# EAGLE board Bio_v4_LCD1_1_pan (EAGLE 6.5.0)
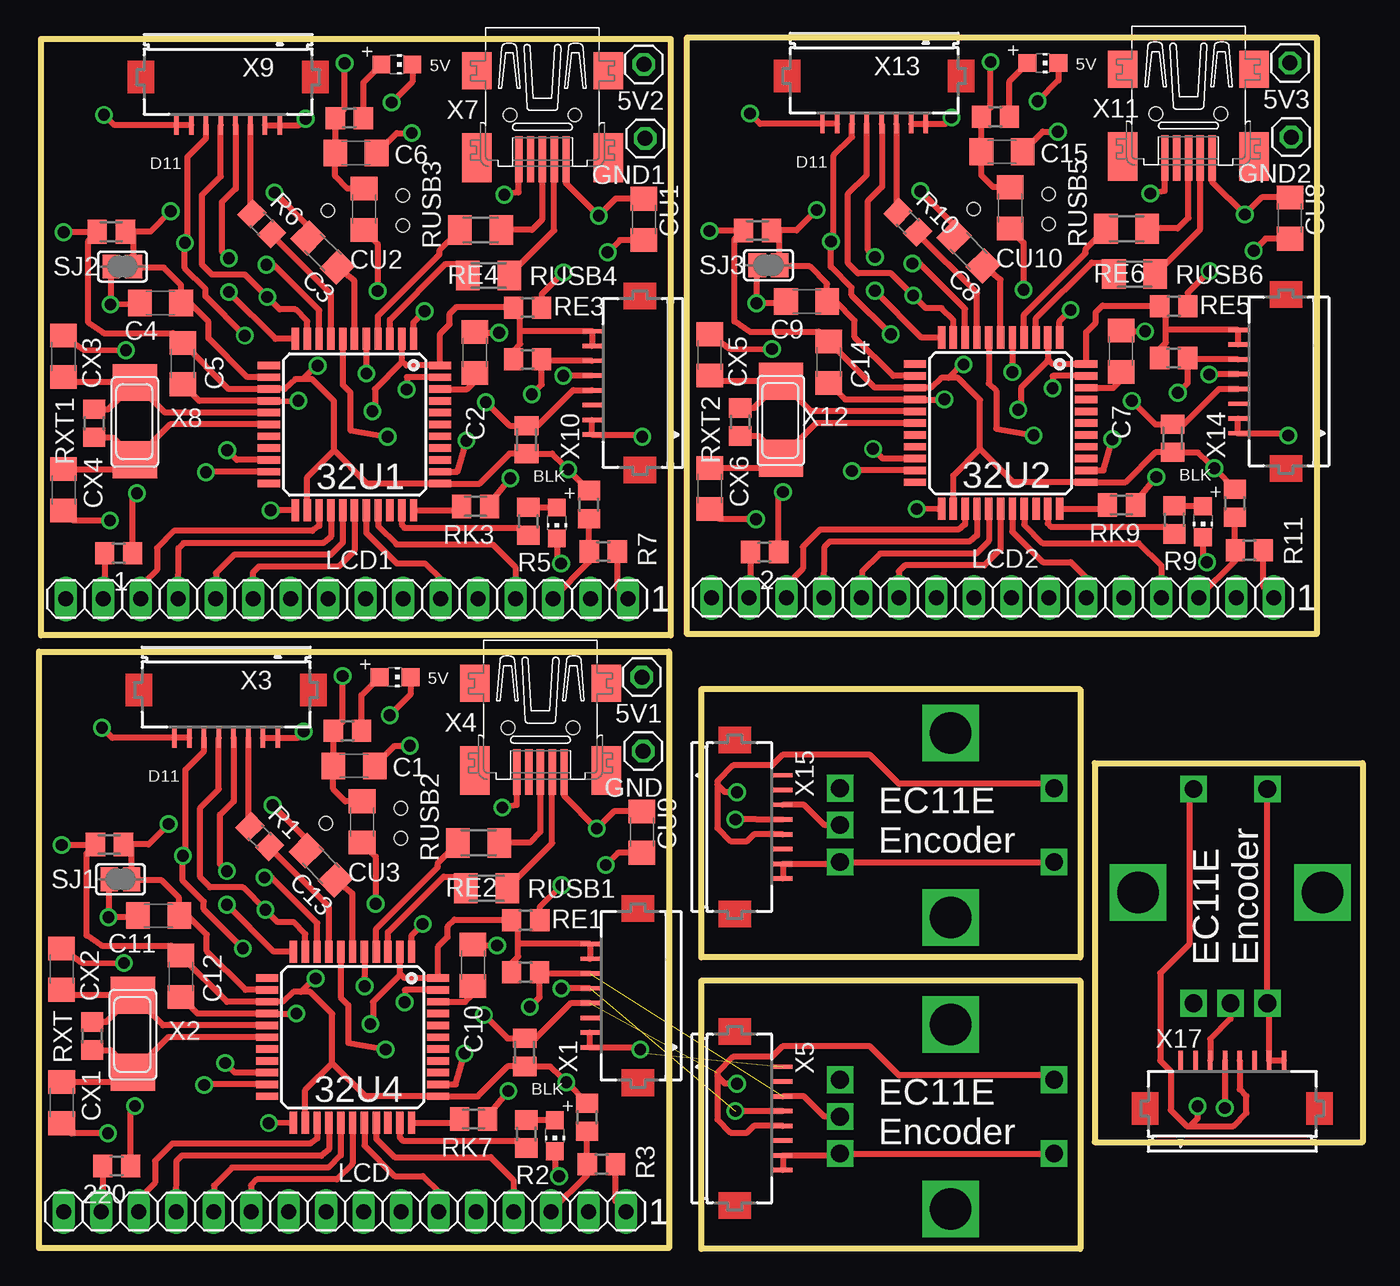
[diagram p0: board, top side]
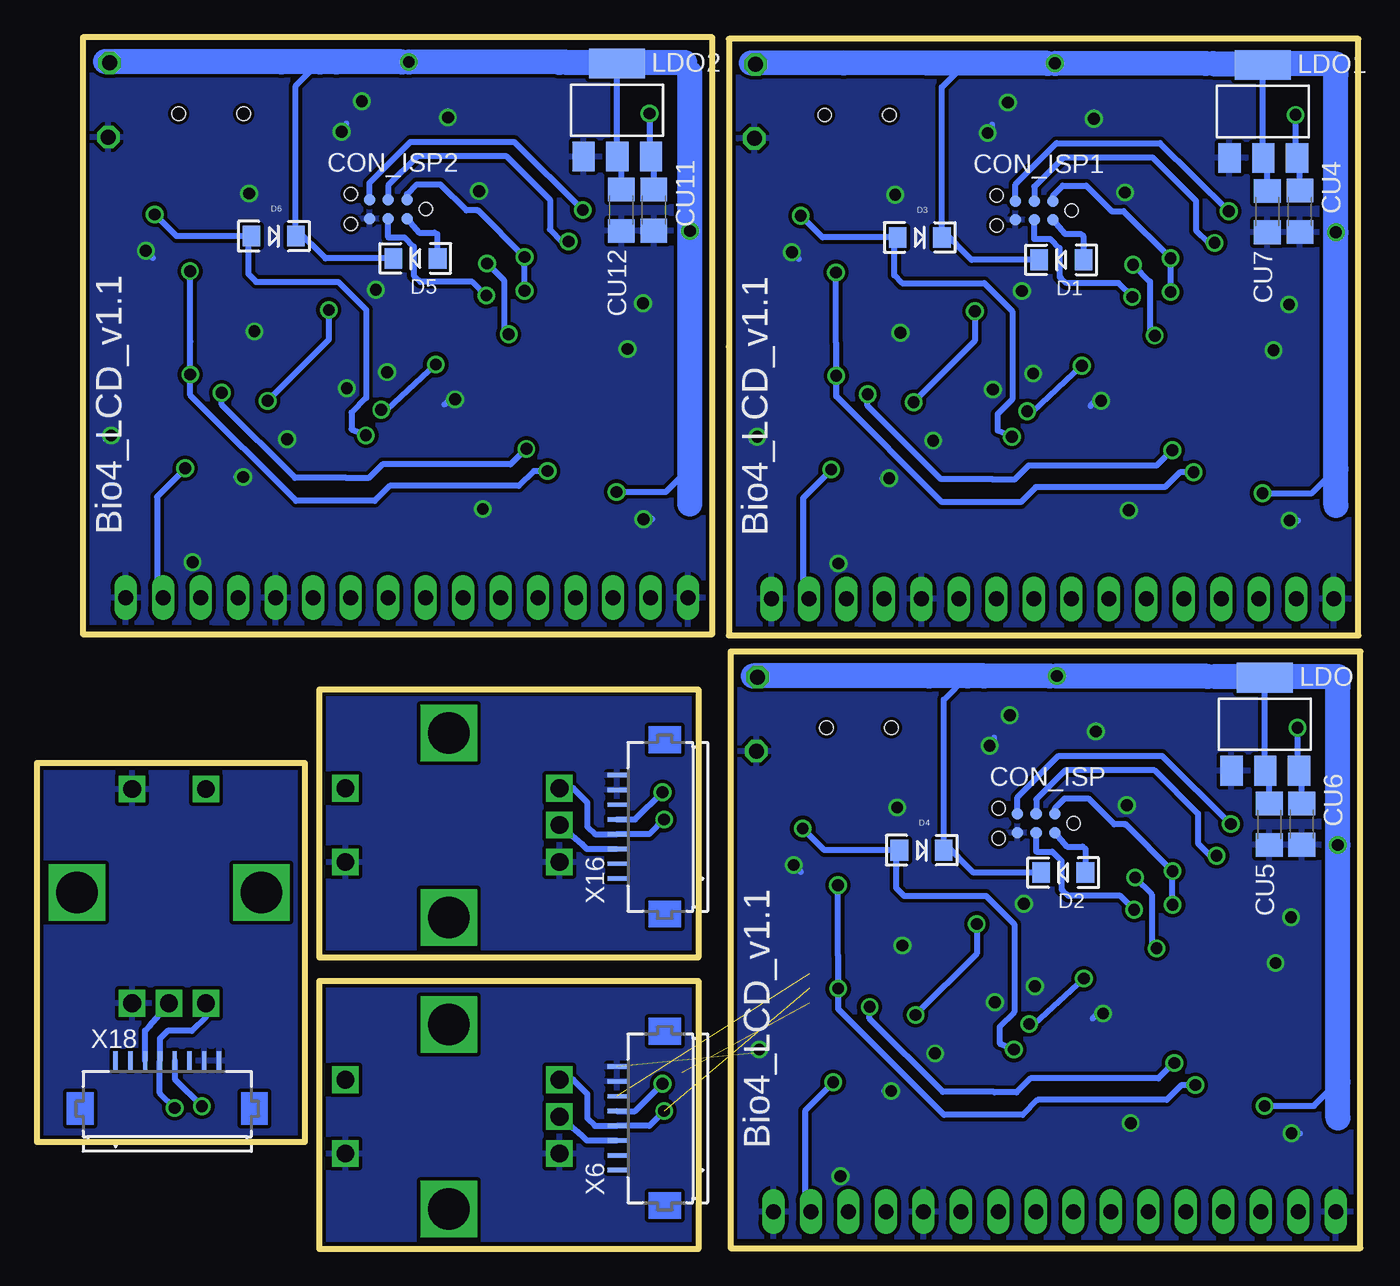
[diagram p1: board, bottom side, seen from below]

Size 89.67 x 82.05 mm. Coordinates in mm from the lower left corner, seen from the top.
Outline: 42.66,0.05 0,0.05 0,40.46 42.66,40.46 42.66,19.61 42.66,19.57 42.66,0.05
Outline: 70.53,0 44.86,0 44.86,18.14 70.53,18.14 70.53,0
Outline: 42.79,41.55 0.13,41.55 0.13,81.96 42.79,81.96 42.79,61.11 42.79,61.07 42.79,41.55
Outline: 86.56,41.64 43.9,41.64 43.9,82.05 86.56,82.05 86.56,61.2 86.56,61.16 86.56,41.64
Outline: 70.53,19.75 44.86,19.75 44.86,37.89 70.53,37.89 70.53,19.75
Outline: 89.67,32.9 89.67,7.23 71.53,7.23 71.53,32.9 89.67,32.9
Copper layers (1*2*15*16): Top 0.035mm / dielectric 0.2mm / layer 2 0.0175mm / dielectric 1.1mm / layer 15 0.0175mm / dielectric 0.2mm / Bottom 0.035mm
Design rules "SeeedStudio_DRU_no_angle_20130527": minimum track width 6mil, minimum drill 12mil, track to track 6mil, track to pad 6mil, pad to pad 6mil, via to via 6mil, smd to smd 0mil, copper to edge 10mil, drill to drill 10mil, minimum pad ring 6mil, minimum via ring 6mil, stop-mask expansion 2mil, vias tented up to drill 25mil, thermal gap 10mil
Net classes: 0 default: width 0.203 mm, clearance 0.25 mm; 1 power: width 0.203 mm, drill 0.305 mm, clearance 0.25 mm; 2 VIN: width 0.457 mm, clearance 0.25 mm; 3 fine: width 0.254 mm, clearance 0.25 mm; 4 aref: width 0.356 mm, clearance 0.25 mm
vRestrict: area 8.7,33.5 to 16.8,37.3; area 8.8,75 to 16.9,78.8; area 52.6,75.1 to 60.7,78.9

## Footprints (pad centres in the part's own frame; a part is rotated, then mirrored left to right if it is on the bottom)
R0805 = smd 1.3 x 1.5: 1 -0.95,0; 2 0.95,0
1X01 = drill 1.016 octagon: 1 0,0
TQFP44 = smd 1.5 x 0.5: 1 -5.8,4; 2 -5.8,3.2; 3 -5.8,2.4; 4 -5.8,1.6; 5 -5.8,0.8; 6 -5.8,0; 7 -5.8,-0.8; 8 -5.8,-1.6; 9 -5.8,-2.4; 10 -5.8,-3.2; 11 -5.8,-4; 23 5.8,-4; 24 5.8,-3.2; 25 5.8,-2.4; 26 5.8,-1.6; 27 5.8,-0.8; 28 5.8,0; 29 5.8,0.8; 30 5.8,1.6; 31 5.8,2.4; 32 5.8,3.2; 33 5.8,4 | smd 0.5 x 1.5: 12 -4,-5.8; 13 -3.2,-5.8; 14 -2.4,-5.8; 15 -1.6,-5.8; 16 -0.8,-5.8; 17 0,-5.8; 18 0.8,-5.8; 19 1.6,-5.8; 20 2.4,-5.8; 21 3.2,-5.8; 22 4,-5.8; 34 4,5.8; 35 3.2,5.8; 36 2.4,5.8; 37 1.6,5.8; 38 0.8,5.8; 39 0,5.8; 40 -0.8,5.8; 41 -1.6,5.8; 42 -2.4,5.8; 43 -3.2,5.8; 44 -4,5.8
CHIP-LED0805 = smd 1.2 x 1.2: A 0,-1.05; C 0,1.05
C1206 = smd 1.6 x 1.8: 1 -1.4,0; 2 1.4,0
TC2030-MCP-NL = smd 0.787 x 0.787: 5V 1.27,0.635; GND 3.81,0.635; MISO 1.27,-0.635; MOSI 2.54,0.635; RESET 3.81,-0.635; SCK 2.54,-0.635 | hole 0.889: 0,0; 5.08,-1.016; 5.08,1.016
LED-1206 = smd 1.2 x 1.4: A -1.5,0; C 1.5,0
1X16 = drill 1.016 long: 1 -19.05,0; 2 -16.51,0; 3 -13.97,0; 4 -11.43,0; 5 -8.89,0; 6 -6.35,0; 7 -3.81,0; 8 -1.27,0; 9 1.27,0; 10 3.81,0; 11 6.35,0; 12 8.89,0; 13 11.43,0; 14 13.97,0; 15 16.51,0; 16 19.05,0
SOT223 = smd 1.499 x 2.007: 1 -2.261,-3.15; 2 0.025,-3.15; 3 2.311,-3.15 | smd 3.81 x 2.007: 4 0,3.15
M0805 = smd 1.3 x 1.6: 1 -0.95,0; 2 0.95,0
M1206 = smd 1.6 x 2: 1 -1.4,0; 2 1.4,0
SJ = smd 1.168 x 1.6: 1 -0.762,0; 2 0.762,0
EC11E = drill 1.2 square: A -2.5,0; B 0,0; C 2.5,0; D -2.5,14.5; E 2.5,14.5 | drill 2.8 square: P$1 6.25,7.5; P$2 -6.25,7.5
FH12-08S-1SH = smd 0.3 x 1.3: 1 -3.5,3.25; 2 -2.5,3.25; 3 -1.5,3.25; 4 -0.5,3.25; 5 0.5,3.25; 6 1.5,3.25; 7 2.5,3.25; 8 3.5,3.25
NX6035 = smd 2.5 x 3: P$1 2.665,0; P$2 -2.565,0
32005-201 = smd 3.1 x 0.5: 1 3,1.6; 2 3,0.8; 3 3,0; 4 3,-0.8; 5 3,-1.6 | smd 2.5 x 2: M1 -3,-4.45; M2 -3,4.45 | smd 3.3 x 2: M3 2.9,4.45; M4 2.9,-4.45 | hole 0.9: 0,2.2; 0,-2.2

## Placement (x,y rotation side)
1  220  [R0805]  5.39,47.11 180 top
2  220  [R0805]  49.16,47.2 180 top
5V1  [1X01]  40.84,38.73 180 top
5V2  [1X01]  40.97,80.24 180 top
5V3  [1X01]  84.74,80.33 180 top
32U1  32U4  [TQFP44]  21.37,55.84 270 top
32U2  32U4  [TQFP44]  65.14,55.93 270 top
32U4  32U4  [TQFP44]  21.24,14.33 270 top
220  220  [R0805]  5.25,5.61 180 top
BKLD  RED  [CHIP-LED0805]  34.95,7.66 180 top
BKLD1  RED  [CHIP-LED0805]  35.08,49.16 180 top
BKLD2  RED  [CHIP-LED0805]  78.85,49.25 180 top
C1  100nF  [C1206]  21.34,32.72 0 top
C2  100nF  [C1206]  29.52,60.71 90 top
C3  100nF  [C1206]  19.21,67.48 315 top
C4  100nF  [C1206]  8.23,64.07 180 top
C5  100nF  [C1206]  9.73,59.96 90 top
C6  100nF  [C1206]  21.47,74.22 0 top
C7  100nF  [C1206]  73.3,60.8 90 top
C8  100nF  [C1206]  62.98,67.57 315 top
C9  100nF  [C1206]  52,64.16 180 top
C10  100nF  [C1206]  29.39,19.21 90 top
C11  100nF  [C1206]  8.1,22.57 180 top
C12  100nF  [C1206]  9.6,18.46 90 top
C13  100nF  [C1206]  19.08,25.98 315 top
C14  100nF  [C1206]  53.5,60.05 90 top
C15  100nF  [C1206]  65.24,74.31 0 top
CON_ISP  SPI  [TC2030-MCP-NL]  19.43,28.83 180 bottom
CON_ISP1  SPI  [TC2030-MCP-NL]  19.56,70.33 180 bottom
CON_ISP2  SPI  [TC2030-MCP-NL]  63.33,70.42 180 bottom
CU1  10uF  [C1206]  40.97,69.73 90 top
CU2  10uF  [C1206]  22.02,70.42 270 top
CU3  10uF  [C1206]  21.88,28.92 270 top
CU4  10uF  [C1206]  4.1,70.27 270 bottom
CU5  10uF  [C1206]  6.17,28.75 270 bottom
CU6  10uF  [C1206]  3.97,28.77 270 bottom
CU7  10uF  [C1206]  6.3,70.26 270 bottom
CU8  10uF  [C1206]  84.75,69.82 90 top
CU9  10uF  [C1206]  40.84,28.23 90 top
CU10  10uF  [C1206]  65.79,70.51 270 top
CU11  10uF  [C1206]  47.87,70.36 270 bottom
CU12  10uF  [C1206]  50.07,70.35 270 bottom
CX1  22pF  [C1206]  1.53,9.91 90 top
CX2  22pF  [C1206]  1.52,18.95 270 top
CX3  22pF  [C1206]  1.65,60.45 270 top
CX4  22pF  [C1206]  1.66,51.41 90 top
CX5  22pF  [C1206]  45.42,60.55 270 top
CX6  22pF  [C1206]  45.43,51.5 90 top
D1  1N581D1206  [LED-1206]  20.26,66.99 180 bottom
D2  1N581D1206  [LED-1206]  20.12,25.49 180 bottom
D3  1N581D1206  [LED-1206]  29.86,68.5 0 bottom
D4  1N581D1206  [LED-1206]  29.73,27 0 bottom
D5  1N581D1206  [LED-1206]  64.03,67.08 180 bottom
D6  1N581D1206  [LED-1206]  73.63,68.59 0 bottom
GND  [1X01]  40.93,33.71 180 top
GND1  [1X01]  41.06,75.21 180 top
GND2  [1X01]  84.83,75.3 180 top
LCD  [1X16]  20.72,2.52 180 top
LCD1  [1X16]  20.85,44.02 180 top
LCD2  [1X16]  64.62,44.11 180 top
LDO  NCP1117LPST50T3G  [SOT223]  6.47,35.53 0 bottom
LDO1  NCP1117LPST50T3G  [SOT223]  6.6,77.04 0 bottom
LDO2  NCP1117LPST50T3G  [SOT223]  50.37,77.13 0 bottom
LDPW1  RED  [CHIP-LED0805]  24.24,80.22 270 top
LDPW2  RED  [CHIP-LED0805]  68.01,80.31 270 top
LDPW5  RED  [CHIP-LED0805]  24.11,38.72 270 top
R1  1k  [R0805]  14.95,27.93 315 top
R2  1k  [R0805]  33.01,7.78 90 top
R3  1k  [R0805]  38.09,5.73 0 top
R4  1k  [R0805]  21.02,76.59 0 top
R5  1k  [R0805]  33.14,49.28 90 top
R6  1k  [R0805]  15.08,69.43 315 top
R7  1k  [R0805]  38.22,47.24 0 top
R8  1k  [R0805]  64.79,76.68 0 top
R9  1k  [R0805]  76.91,49.37 90 top
R10  1k  [R0805]  58.85,69.52 315 top
R11  1k  [R0805]  82,47.33 0 top
R13  1k  [R0805]  20.89,35.08 0 top
RE1  5k  [R0805]  32.97,22.25 0 top
RE2  5k  [R0805]  32.96,18.74 0 top
RE3  5k  [R0805]  33.1,63.75 0 top
RE4  5k  [R0805]  33.09,60.25 0 top
RE5  5k  [R0805]  76.87,63.84 0 top
RE6  5k  [R0805]  76.86,60.34 0 top
RK1  10k  [R0805]  37.12,8.91 270 top
RK2  10k  [M0805]  32.9,13.3 270 top
RK3  10k  [M0805]  29.56,50.29 180 top
RK4  10k  [M0805]  4.89,68.89 180 top
RK5  10k  [R0805]  37.25,50.41 270 top
RK6  10k  [M0805]  4.76,27.39 180 top
RK7  10k  [M0805]  29.43,8.79 180 top
RK8  10k  [M0805]  33.03,54.81 270 top
RK9  10k  [M0805]  73.34,50.38 180 top
RK10  10k  [M0805]  48.66,68.98 180 top
RK11  10k  [R0805]  81.02,50.5 270 top
RK12  10k  [M0805]  76.8,54.9 270 top
RUSB1  22  [M1206]  30.31,24.42 0 top
RUSB2  22  [M1206]  29.77,27.5 0 top
RUSB3  22  [M1206]  29.91,69 0 top
RUSB4  22  [M1206]  30.44,65.93 0 top
RUSB5  22  [M1206]  73.68,69.09 0 top
RUSB6  22  [M1206]  74.22,66.02 0 top
RXT  1M  [R0805]  3.6,14.42 270 top
RXT1  1M  [R0805]  3.73,55.92 270 top
RXT2  1M  [R0805]  47.5,56.01 270 top
SJ1  [SJ]  5.51,25.03 0 top
SJ2  [SJ]  5.64,66.53 0 top
SJ3  [SJ]  49.41,66.62 0 top
U$1  EC11E  [EC11E]  54.27,8.95 270 top
U$2  EC11E  [EC11E]  54.27,28.7 270 top
U$3  EC11E  [EC11E]  80.72,16.64 0 top
X1  FH12-08S-1SH  [FH12-08S-1SH]  40.57,17.15 90 top
X2  16MHz  [NX6035]  6.36,14.51 90 top
X3  FH12-08S-1SH  [FH12-08S-1SH]  12.67,37.85 180 top
X4  MINI-USB  [32005-201]  33.97,35.3 270 top
X5  FH12-08S-1SH  [FH12-08S-1SH]  47.14,8.83 270 top
X6  FH12-08S-1SH  [FH12-08S-1SH]  47.12,8.84 90 bottom
X7  MINI-USB  [32005-201]  34.1,76.8 270 top
X8  16MHz  [NX6035]  6.49,56.02 90 top
X9  FH12-08S-1SH  [FH12-08S-1SH]  12.8,79.36 180 top
X10  FH12-08S-1SH  [FH12-08S-1SH]  40.71,58.65 90 top
X11  MINI-USB  [32005-201]  77.87,76.89 270 top
X12  16MHz  [NX6035]  50.26,56.11 90 top
X13  FH12-08S-1SH  [FH12-08S-1SH]  56.58,79.45 180 top
X14  FH12-08S-1SH  [FH12-08S-1SH]  84.48,58.74 90 top
X15  FH12-08S-1SH  [FH12-08S-1SH]  47.14,28.58 270 top
X16  FH12-08S-1SH  [FH12-08S-1SH]  47.12,28.58 90 bottom
X17  FH12-08S-1SH  [FH12-08S-1SH]  80.84,9.51 0 top
X18  FH12-08S-1SH  [FH12-08S-1SH]  80.84,9.5 0 bottom

## Library data of the parts
1 2 220 C1-C15 CU1-CU12 CX1-CX6 R1-R3 R5-R7 R9-R11 RE1-RE6 RK1 RK5 RK11 RXT RXT1 RXT2 = rcl
5V1-5V3 GND GND1 GND2 = Headerlibrary
32U1 32U2 32U4 BKLD BKLD1 BKLD2 LDPW1 LDPW2 LDPW5 = adafruit
CON_ISP CON_ISP1 CON_ISP2 D1-D6 LCD LCD1 LCD2 LDO LDO1 LDO2 U$1-U$3 X2 X8 X12 = lpatiny
R4 R8 R13 RK2-RK4 RK6-RK10 RK12 RUSB1-RUSB6 = resistor
SJ1-SJ3 = jumper
X1 X3 X5 X6 X9 X10 X13-X18 = con-hirose; OC_FARNELL: unknown; OC_NEWARK: unknown
X4 X7 X11 = con-cypressindustries; OC_FARNELL: unknown; OC_NEWARK: unknown

## Nets
+5V/1 [fine]: 5V1.1 32U4.2 32U4.14 32U4.24 32U4.34 32U4.44 220.1 C1.1 C12.2 CU3.1 CU5.1 D2.C D4.C LCD.2 LDO.2 LDO.4 R13.1 RE1.1 RE2.1 RK1.1 RK2.2 RK6.2 X1.7 X1.8
+5V/2 [fine]: 1.1 5V2.1 32U1.2 32U1.14 32U1.24 32U1.34 32U1.44 C5.2 C6.1 CU2.1 CU7.1 D1.C D3.C LCD1.2 LDO1.2 LDO1.4 R4.1 RE3.1 RE4.1 RK4.2 RK5.1 RK8.2 X10.7 X10.8
+5V/3 [fine]: 2.1 5V3.1 32U2.2 32U2.14 32U2.24 32U2.34 32U2.44 C14.2 C15.1 CU10.1 CU12.1 D5.C D6.C LCD2.2 LDO2.2 LDO2.4 R8.1 RE5.1 RE6.1 RK10.2 RK11.1 RK12.2 X14.7 X14.8
+12V [power]: CU6.1 LDO.3 X3.7 X3.8
+12V1 [power]: CU4.1 LDO1.3 X9.7 X9.8
+12V2 [power]: CU11.1 LDO2.3 X13.7 X13.8
A0: 32U4.36
A1: 32U4.37
A2: 32U4.38
A3: 32U4.39
A4: 32U4.40
A5: 32U4.41
A6: 32U4.25 LCD.14
A7: 32U1.38
A8: 32U1.39
A9: 32U1.40
A10: 32U1.41
A11: 32U1.37
A12: 32U1.36
A13: 32U1.25 LCD1.14
A14: 32U2.38
A15: 32U2.39
A16: 32U2.40
A17: 32U2.41
A18: 32U2.37
A19: 32U2.36
A20: 32U2.25 LCD2.14
AREF: 32U4.42 C10.1
AREF1: 32U1.42 C2.1
AREF2: 32U2.42 C7.1
CS_32U1: R6.1 X9.3
CS_32U2: R10.1 X13.3
CS_32U4: R1.1 X3.3
D5*: 32U4.31
D5*1: 32U1.31
D5*2: 32U2.31
D6*: 32U4.27 LCD.12
D6*1: 32U1.27 LCD1.12
D6*2: 32U2.27 LCD2.12
D7*: 32U4.1 RK2.1 U$1.D X1.4 X5.5 X6.5
D7*1: 32U1.1 RK8.1 X10.4
D7*2: 32U2.1 RK12.1 X14.4
D7*3: U$2.D X15.5 X16.5
D7*4: U$3.D X17.5 X18.5
D8*: 32U4.28 LCD.11
D8*1: 32U1.28 LCD1.11
D8*2: 32U2.28 LCD2.11
D9*: 32U4.29 LCD.6
D9*1: 32U1.29 LCD1.6
D9*2: 32U2.29 LCD2.6
D10*: 32U4.30 LCD.4
D10*1: 32U1.30 LCD1.4
D10*2: 32U2.30 LCD2.4
D11*: 32U4.12
D11*1: 32U1.12
D11*2: 32U2.12
D12*: 32U4.26 LCD.13
D12*1: 32U1.26 LCD1.13
D12*2: 32U2.26 LCD2.13
D13*: 32U4.32 R2.1
D13*1: 32U1.32 R5.1
D13*2: 32U2.32 R9.1
GND [power]: 32U4.5 32U4.15 32U4.23 32U4.35 32U4.43 BKLD.C C1.2 C10.2 C11.2 C12.1 C13.1 CON_ISP.GND CU3.2 CU5.2 CU6.2 CU9.1 CX1.1 CX2.1 GND.1 LCD.1 LCD.5 LCD.16 LDO.1 LDPW5.C R3.2 RK7.1 SJ1.1 U$1.C U$1.E X1.1 X1.2 X3.1 X3.2 X4.5 X5.7 X5.8 X6.7 X6.8
GND1 [power]: 32U1.5 32U1.15 32U1.23 32U1.35 32U1.43 BKLD1.C C2.2 C3.1 C4.2 C5.1 C6.2 CON_ISP1.GND CU1.1 CU2.2 CU4.2 CU7.2 CX3.1 CX4.1 GND1.1 LCD1.1 LCD1.5 LCD1.16 LDO1.1 LDPW1.C R7.2 RK3.1 SJ2.1 X7.5 X9.1 X9.2 X10.1 X10.2
GND2 [power]: 32U2.5 32U2.15 32U2.23 32U2.35 32U2.43 BKLD2.C C7.2 C8.1 C9.2 C14.1 C15.2 CON_ISP2.GND CU8.1 CU10.2 CU11.2 CU12.2 CX5.1 CX6.1 GND2.1 LCD2.1 LCD2.5 LCD2.16 LDO2.1 LDPW2.C R11.2 RK9.1 SJ3.1 X11.5 X13.1 X13.2 X14.1 X14.2
GND3 [power]: U$2.C U$2.E X15.7 X15.8 X16.7 X16.8
GND4 [power]: U$3.C U$3.E X17.7 X17.8 X18.7 X18.8
HWB: 32U4.33 RK7.2
HWB1: 32U1.33 RK3.2
HWB2: 32U2.33 RK9.2
ISP+5V: CON_ISP.5V D2.A
ISP+5V1: CON_ISP1.5V D1.A
ISP+5V2: CON_ISP2.5V D5.A
MISO: 32U4.11 CON_ISP.MISO X3.4
MISO1: 32U1.11 CON_ISP1.MISO X9.4
MISO2: 32U2.11 CON_ISP2.MISO X13.4
MOSI: 32U4.10 CON_ISP.MOSI X3.5
MOSI1: 32U1.10 CON_ISP1.MOSI X9.5
MOSI2: 32U2.10 CON_ISP2.MOSI X13.5
N$1: 32U4.6 C13.2
N$2: LCD.3 R3.1 RK1.2
N$3: BKLD.A R2.2
N$4: LDPW1.A R4.2
N$5: BKLD1.A R5.2
N$6: 32U1.17 CX4.2 RXT1.2 X8.P$2
N$7: 32U1.6 C3.2
N$8: LCD1.3 R7.1 RK5.2
N$9: 1.2 LCD1.15
N$10: LDPW2.A R8.2
N$11: 220.2 LCD.15
N$12: LDPW5.A R13.2
N$13: BKLD2.A R9.2
N$14: 32U2.17 CX6.2 RXT2.2 X12.P$2
N$15: 32U2.6 C8.2
N$16: LCD2.3 R11.1 RK11.2
N$17: 2.2 LCD2.15
N$42: 32U4.17 CX1.2 RXT.2 X2.P$2
RESET: 32U4.13 C11.1 CON_ISP.RESET RK6.1 SJ1.2
RESET1: 32U1.13 C4.1 CON_ISP1.RESET RK4.1 SJ2.2
RESET2: 32U2.13 C9.1 CON_ISP2.RESET RK10.1 SJ3.2
RX: 32U4.20 RE2.2 U$1.B X1.6 X5.3 X6.3
RX1: 32U1.20 RE4.2 X10.6
RX2: 32U2.20 RE6.2 X14.6
RX3: U$2.B X15.3 X16.3
RX4: U$3.B X17.3 X18.3
RXLED: 32U4.8 R1.2
RXLED1: 32U1.8 R6.2
RXLED2: 32U2.8 R10.2
SCK: 32U4.9 CON_ISP.SCK X3.6
SCK1: 32U1.9 CON_ISP1.SCK X9.6
SCK2: 32U2.9 CON_ISP2.SCK X13.6
SCL: 32U4.18
SCL1: 32U1.18
SCL2: 32U2.18
SDA: 32U4.19
SDA1: 32U1.19
SDA2: 32U2.19
TX: 32U4.21 RE1.2 U$1.A X1.5 X5.4 X6.4
TX1: 32U1.21 RE3.2 X10.5
TX2: 32U2.21 RE5.2 X14.5
TX3: U$2.A X15.4 X16.4
TX4: U$3.A X17.4 X18.4
TXLED: 32U4.22
TXLED1: 32U1.22
TXLED2: 32U2.22
USB_N: 32U4.3 RUSB1.1
USB_N1: 32U1.3 RUSB4.1
USB_N2: 32U2.3 RUSB6.1
USB_P: 32U4.4 RUSB2.1
USB_P1: 32U1.4 RUSB3.1
USB_P2: 32U2.4 RUSB5.1
USBC_N: RUSB1.2 X4.2
USBC_N1: RUSB4.2 X7.2
USBC_N2: RUSB6.2 X11.2
USBC_P: RUSB2.2 X4.3
USBC_P1: RUSB3.2 X7.3
USBC_P2: RUSB5.2 X11.3
VUSB: 32U4.7 CU9.2 D4.A X4.1
VUSB1: 32U1.7 CU1.2 D3.A X7.1
VUSB2: 32U2.7 CU8.2 D6.A X11.1
XTAL1: 32U4.16 CX2.2 RXT.1 X2.P$1
XTAL2: 32U1.16 CX3.2 RXT1.1 X8.P$1
XTAL3: 32U2.16 CX5.2 RXT2.1 X12.P$1

## Tracks (layer width: path | path; a pad name or v marks a point on that pad's centre or on a via)
+5V/1  (via drill 0.8, 0.8 pad 0.61, 0.8 pad 0.81)
  Top 0.406: 32U4.24 18.04,10.77 19.85,12.59 | 19.85,12.59 19.85,15.91 18.36,17.4 17.73,17.4 | 17.73,17.4 17.23,17.4 16.51,16.74 15.45,16.74 32U4.14 12.73,16.74 C12.2 8.93,20.53 4.23,20.53 3.21,21.23 3.21,26.79 3.78,27.35 | 19.85,12.59 22.11,10.34 32U4.34 29.71,10.34 31.73,12.35 RK2.2 34.62,12.35 35.35,11.65 v35.72,11.28 RK1.1 36.89,10.09 | 24.44,18.65 24.76,18.34 32U4.44 27.04,20.49 27.68,21.14 27.68,21.84 28.14,22.3 31.98,22.3 RE1.1 32.45,21.82 32.45,20.63 | 32U4.2 24.44,18.65 | 24.44,18.65 24.44,18.55 22.62,16.73 22.62,15.42 v22.44,15.23 | v18.74,18.31 18.74,18.41 17.73,17.4 | RK6.2 3.78,27.35 | 3.78,27.35 v1.52,27.35 | v20.56,38.8 20.56,35.71 R13.1 C1.1 19.93,31.14 20.75,30.32 CU3.1 | 220.1 6.2,9.39 v6.49,9.68 | RE2.1 32.01,19.34 32.45,19.79 32.45,20.63 | 32.45,20.63 32.47,20.65 X1.8 X1.7
  Bottom 0.406: 1.52,8.36 1.52,8.85 | 1.52,38.05 1.52,38.76 | v22.44,15.23 22.04,15.23 v18.74,18.31 | 1.52,38.4 1.88,38.76 | v6.49,9.68 3.15,9.68 1.52,11.31 | D4.C 28.23,27.51 | 28.23,27.51 28.23,37.19 26.61,38.81 | D2.C 26.21,25.49 28.23,27.51 | 6.47,38.76 LDO.4 | 6.47,38.78 LDO.4 | LDO.4 6.47,32.38 LDO.2 6.17,32.11 CU5.1 | 5V1.1 41.42,38.93 41.13,38.82 | LCD.2 37.63,2.92 37.63,9.34 36.07,10.9 v35.72,11.28 | 9.86,38.78 10.37,38.78 9.86,38.78 | v20.56,38.8 21.06,38.8 v20.57,38.8 v20.56,38.8
  Bottom 1.676: 1.52,8.85 1.52,11.31 v1.52,27.35 1.52,38.05 1.52,38.4 | 1.52,38.76 1.88,38.76 6.47,38.76 | 10.37,38.78 v20.56,38.8 | 21.06,38.8 25.49,38.81 26.61,38.81 29.21,38.81 34.88,38.82 41.13,38.82 | 9.86,38.78 6.47,38.78
+5V/2  (via drill 0.8, 0.8 pad 0.61, 0.8 pad 0.81)
  Top 0.406: 32U1.24 18.17,52.28 19.98,54.09 | 19.98,54.09 19.98,57.42 18.5,58.91 17.86,58.91 | 17.86,58.91 17.36,58.91 16.64,58.24 32U1.14 12.86,58.24 C5.2 9.06,62.03 4.37,62.03 3.34,62.73 3.34,68.29 3.91,68.86 | 19.98,54.09 22.24,51.84 32U1.34 29.84,51.84 31.86,53.86 RK8.2 34.75,53.86 35.48,53.15 v35.85,52.78 RK5.1 37.02,51.59 | 24.57,60.15 24.89,59.84 32U1.44 27.17,62 27.82,62.64 27.82,63.34 28.27,63.8 32.11,63.8 RE3.1 32.59,63.32 32.59,62.13 | 32U1.2 24.57,60.15 | 24.57,60.15 24.57,60.05 22.75,58.23 22.75,56.92 v22.57,56.74 | v18.87,59.81 18.87,59.91 17.86,58.91 | RK4.2 3.91,68.86 | 3.91,68.86 v1.66,68.86 | v20.7,80.3 20.7,77.21 R4.1 C6.1 20.06,74.21 20.06,72.64 20.88,71.82 CU2.1 | 1.1 6.34,50.89 v6.63,51.18 | RE4.1 32.14,60.85 32.59,61.29 32.59,62.13 | 32.59,62.13 32.6,62.15 X10.8 X10.7
  Bottom 0.406: 1.65,49.86 1.65,50.35 | 1.66,80.26 1.66,79.56 1.66,79.9 | v22.57,56.74 22.17,56.74 v18.87,59.81 | v6.63,51.18 3.29,51.18 1.65,52.81 | D3.C 28.36,69.01 | 28.36,69.01 28.36,78.7 26.74,80.31 | D1.C 26.34,66.99 28.36,69.01 | 6.6,80.26 LDO1.4 | 6.6,80.28 LDO1.4 | LDO1.4 6.6,73.89 LDO1.2 6.3,73.61 CU7.1 | 5V2.1 41.56,80.43 41.26,80.32 | LCD1.2 37.76,44.42 37.76,50.84 36.2,52.41 v35.85,52.78 | 9.99,80.28 10.5,80.28 9.99,80.28 | v20.7,80.3 21.19,80.3 v20.7,80.3
  Bottom 1.676: 1.65,50.35 1.65,52.81 v1.66,68.86 1.66,79.56 | 1.66,80.26 2.02,80.26 | 10.5,80.28 v20.7,80.3 | 21.19,80.3 25.62,80.31 26.74,80.31 29.34,80.31 35.01,80.32 41.26,80.32 | 1.66,79.9 2.02,80.26 | 2.02,80.26 6.6,80.26 | 9.99,80.28 6.6,80.28
+5V/3  (via drill 0.8, 0.8 pad 0.61, 0.8 pad 0.81)
  Top 0.406: 32U2.24 61.94,52.37 63.76,54.18 | 63.76,54.18 63.76,57.51 62.27,59 61.63,59 | 61.63,59 61.13,59 60.41,58.33 59.36,58.33 32U2.14 56.63,58.33 C14.2 52.83,62.12 48.14,62.12 47.11,62.82 47.11,68.38 47.68,68.95 | 63.76,54.18 66.01,51.93 32U2.34 73.62,51.93 75.63,53.95 RK12.2 78.52,53.95 79.25,53.24 v79.62,52.87 RK11.1 80.79,51.68 | 68.34,60.24 68.66,59.93 32U2.44 70.94,62.09 71.59,62.73 71.59,63.43 72.04,63.89 75.88,63.89 RE5.1 76.36,63.41 76.36,62.22 | 32U2.2 68.34,60.24 | 68.34,60.24 68.34,60.14 66.52,58.32 66.52,57.01 v66.34,56.83 | v62.64,59.9 62.64,60 61.63,59 | RK10.2 47.68,68.95 | 47.68,68.95 v45.43,68.95 | v64.47,80.39 64.47,77.3 R8.1 C15.1 63.83,74.3 63.83,72.73 64.65,71.91 CU10.1 | 2.1 50.11,50.98 v50.4,51.27 | RE6.1 75.91,60.94 76.36,61.38 76.36,62.22 | 76.36,62.22 76.38,62.24 X14.8 X14.7
  Bottom 0.406: 45.43,49.95 45.43,50.44 | 53.76,80.37 54.27,80.37 | v66.34,56.83 65.94,56.83 v62.64,59.9 | v50.4,51.27 47.06,51.27 45.43,52.9 | D6.C 72.13,69.1 | 72.13,69.1 72.13,78.79 70.51,80.4 | D5.C 70.11,67.08 72.13,69.1 | 50.37,80.35 LDO2.4 | 50.37,80.37 LDO2.4 | LDO2.4 50.37,73.98 LDO2.2 50.07,73.7 CU12.1 | 5V3.1 85.33,80.52 85.03,80.41 | LCD2.2 81.53,44.51 81.53,50.93 79.97,52.5 v79.62,52.87 | 45.43,79.65 45.43,80.35 45.79,80.35 45.43,79.99 45.43,79.65 | v64.47,80.39 64.96,80.39 v64.47,80.39
  Bottom 1.676: 45.43,50.44 45.43,52.9 v45.43,68.95 45.43,79.65 | 54.27,80.37 v64.47,80.39 | 64.96,80.39 69.39,80.4 70.51,80.4 73.11,80.4 78.78,80.41 85.03,80.41 | 54.27,80.37 53.76,80.37 50.37,80.37 | 45.79,80.35 50.37,80.35
+12V  (via drill 0.8)
  Top 0.406: X3.7 X3.8 4.96,34.6 v4.26,35.3
  Bottom 0.406: v4.26,35.3 4.26,32.49 LDO.3 3.97,32.2 CU6.1
+12V1  (via drill 0.8)
  Top 0.406: X9.7 X9.8 5.09,76.11 v4.39,76.81
  Bottom 0.406: v4.39,76.81 4.39,73.99 LDO1.3 4.1,73.7 CU4.1
+12V2  (via drill 0.8)
  Top 0.406: X13.7 X13.8 48.86,76.2 v48.16,76.9
  Bottom 0.406: v48.16,76.9 48.16,74.08 LDO2.3 47.87,73.79 CU11.1
A6
  Top 0.406: 32U4.25 18.84,7.47 18.37,7.12 9.02,7.12 7.85,5.96 7.85,4.49 6.93,3.57 6.93,2.37 LCD.14
A13
  Top 0.406: 32U1.25 18.97,48.98 18.51,48.63 9.15,48.63 7.98,47.46 7.98,45.99 7.06,45.07 7.06,43.87 LCD1.14
A20
  Top 0.406: 32U2.25 62.74,49.07 62.28,48.72 52.92,48.72 51.75,47.55 51.75,46.08 50.83,45.16 50.83,43.96 LCD2.14
AREF
  Top 0.406: 32U4.42 28.86,16.74 28.87,16.72 29.32,17.18 C10.1
AREF1
  Top 0.406: 32U1.42 28.99,58.24 29,58.23 29.45,58.68 C2.1
AREF2
  Top 0.406: 32U2.42 72.76,58.33 72.77,58.32 73.22,58.77 C7.1
CS_32U1
  Top 0.406: X9.3 14.3,70.21 R6.1
CS_32U2
  Top 0.406: X13.3 58.08,70.3 R10.1
CS_32U4
  Top 0.406: X3.3 14.17,28.7 R1.1
D6*
  Top 0.406: 32U4.27 20.44,6.34 19.6,5.5 13.07,5.5 11.86,4.29 11.86,2.23 LCD.12
D6*1
  Top 0.406: 32U1.27 20.57,47.84 19.73,47.01 13.2,47.01 11.99,45.79 11.99,43.73 LCD1.12
D6*2
  Top 0.406: 32U2.27 64.34,47.93 63.51,47.1 56.97,47.1 55.76,45.88 55.76,43.82 LCD2.12
D7*  (via drill 0.8)  (1 unrouted)
  Top 0.406: X1.4 36.05,16.65 33.65,14.25 RK2.1 31.73,14.25 v30.14,15.84 | U$1.D 68.47,11.75 58.27,11.75 56.3,13.72 50.37,13.72 49.65,13 47.02,13 45.95,11.93 45.95,11.69 | 45.95,11.69 45.95,8.77 46.85,7.87 47.97,7.87 48.43,8.33 X5.5 | v47.29,11.18 46.46,11.18 45.95,11.69 | 32U4.1 25.24,21.25 v25.99,22
  Bottom 0.406: X6.5 49.13,9.34 v47.29,11.18 | v25.99,22 25.99,19.99 v30.14,15.84
D7*1  (via drill 0.8)
  Top 0.406: X10.4 36.18,58.16 33.78,55.76 RK8.1 31.86,55.76 v30.27,57.35 | 32U1.1 25.37,62.75 v26.12,63.51
  Bottom 0.406: v26.12,63.51 26.12,61.49 v30.27,57.35
D7*2  (via drill 0.8)
  Top 0.406: X14.4 79.95,58.25 77.55,55.85 RK12.1 75.63,55.85 v74.04,57.44 | 32U2.1 69.14,62.84 v69.89,63.6
  Bottom 0.406: v69.89,63.6 69.89,61.58 v74.04,57.44
D7*3  (via drill 0.8)
  Top 0.406: U$2.D 68.47,31.5 58.27,31.5 56.3,33.46 50.37,33.46 49.65,32.74 47.02,32.74 45.95,31.67 45.95,31.44 | 45.95,31.44 45.95,28.52 46.85,27.62 47.97,27.62 48.43,28.08 X15.5 | v47.29,30.93 46.46,30.93 45.95,31.44
  Bottom 0.406: X16.5 49.13,29.08 v47.29,30.93
D7*4  (via drill 0.8)
  Top 0.406: U$3.D 77.92,30.84 77.92,20.64 75.95,18.67 75.95,12.74 76.68,12.02 76.68,9.39 77.75,8.32 77.98,8.32 | 77.98,8.32 80.9,8.32 81.8,9.22 81.8,10.34 81.34,10.8 X17.5 | v78.49,9.66 78.49,8.83 77.98,8.32
  Bottom 0.406: X18.5 80.34,11.5 v78.49,9.66
D8*
  Top 0.406: 32U4.28 21.24,5.78 20.16,4.7 14.75,4.7 14.35,4.3 14.35,2.54 LCD.11
D8*1
  Top 0.406: 32U1.28 21.37,47.28 20.29,46.2 14.88,46.2 14.48,45.8 14.48,44.04 LCD1.11
D8*2
  Top 0.406: 32U2.28 65.14,47.37 64.06,46.29 58.65,46.29 58.25,45.9 58.25,44.13 LCD2.11
D9*
  Top 0.406: 32U4.29 22.04,6.99 24.1,4.93 26,4.93 27.09,3.84 27.09,2.54 LCD.6
D9*1
  Top 0.406: 32U1.29 22.17,48.49 24.23,46.43 26.13,46.43 27.22,45.34 27.22,44.04 LCD1.6
D9*2
  Top 0.406: 32U2.29 65.94,48.58 68,46.52 69.9,46.52 70.99,45.43 70.99,44.13 LCD2.6
D10*
  Top 0.406: 32U4.30 22.84,7.45 24.08,6.21 30.59,6.21 32.14,4.66 32.14,2.53 LCD.4
D10*1
  Top 0.406: 32U1.30 22.97,48.96 24.21,47.71 30.72,47.71 32.27,46.16 32.27,44.03 LCD1.4
D10*2
  Top 0.406: 32U2.30 66.74,49.05 67.98,47.8 74.49,47.8 76.04,46.25 76.04,44.12 LCD2.4
D12*
  Top 0.406: 32U4.26 19.64,6.73 19.12,6.3 11.68,6.31 9.66,6.31 9.31,5.96 LCD.13
D12*1
  Top 0.406: 32U1.26 19.77,48.24 19.25,47.81 11.82,47.81 9.79,47.81 9.44,47.46 LCD1.13
D12*2
  Top 0.406: 32U2.26 63.54,48.33 63.02,47.9 55.59,47.9 53.56,47.9 53.21,47.55 LCD2.13
D13*
  Top 0.406: 32U4.32 24.44,7.54 24.62,7.33 32.48,7.33 R2.1
D13*1
  Top 0.406: 32U1.32 24.57,49.05 24.75,48.83 32.62,48.83 R5.1
D13*2
  Top 0.406: 32U2.32 68.34,49.14 68.52,48.92 76.39,48.92 R9.1
GND  (via drill 0.8, 0.8 pad 0.81)  (1 unrouted)
  Top 0.406: v17.43,15.94 17.35,15.92 32U4.15 10.73,15.94 C12.1 | 32U4.5 22.04,18.41 v22.05,17.79 | C11.2 6.54,22.47 v4.7,22.46 4.7,24.98 SJ1.1 | CX2.1 2.89,19.39 v5.75,19.36 | 32U4.23 16.97,8.53 v15.56,8.52 | v4.66,7.83 2.21,7.83 CX1.1 | 32U4.43 24.78,17.54 v24.77,16.7 | C10.2 29.45,20.55 v31.03,20.55 | LDPW5.C 25.16,37.55 v23.75,36.14 | C1.2 24.09,34.07 v25.12,34.07 | CU3.2 22.8,26.56 v22.8,23.37 | v31.38,29.89 32.35,30.05 32.37,30.07 X4.5 | CU9.1 39.21,26.83 v38.39,26.01 | 32U4.35 28.22,11.14 v28.82,13.24 | RK7.1 30.56,9.18 v31.79,10.69 | BKLD.C 34.95,5.19 v35.22,4.92 | LCD.1 39.04,3.25 R3.2 | C13.1 18.09,27.77 v15.82,30.05 | X3.2 X3.1 17.48,34.6 v17.92,35.04 | v40.73,13.5 40.59,13.65 X1.1 X1.2 | X5.8 X5.7 54.14,6.33 U$1.C U$1.E
  Bottom 0.406: v17.43,15.94 17.82,15.93 18.16,15.6 | v4.66,7.83 4.07,7.83 | v5.75,19.36 5.54,19.37 5.41,19.51 | v23.75,36.14 23.89,36.14 23.91,36.16 | v25.12,34.07 24.81,34.39 24.81,34.64 | v22.8,23.37 23.07,23.58 22.97,23.34 | v38.39,26.01 | v38.39,26.01 37.92,25.53 | v31.79,10.69 32.27,10.69 | v35.22,4.92 35.22,5 35.34,5.12 | v17.92,35.04 17.92,35.49 | v40.73,13.5 40.87,13.5 41.12,13.25
  pour Bottom: 0.44,39.91 0.4,39.94 0.67,0.68 42.17,0.84 42.17,20.11 42.36,20.74 42.36,40.65 1.7,40.3 0.68,40.17
  pour Bottom: 44.88,18.13 70.53,18.13 70.53,-0.45 44.71,-0.45 44.71,17.88
GND1  (via drill 0.8, 0.8 pad 0.81)
  Top 0.406: v17.56,57.45 17.49,57.43 32U1.15 10.86,57.44 C5.1 | 32U1.5 22.17,59.91 v22.18,59.29 | C4.2 6.67,63.97 v4.83,63.96 4.83,66.49 SJ2.1 | CX3.1 3.02,60.89 v5.88,60.86 | 32U1.23 17.11,50.03 v15.69,50.02 | v4.79,49.33 2.34,49.33 CX4.1 | 32U1.43 24.91,59.04 v24.9,58.2 | C2.2 29.58,62.05 v31.16,62.05 | LDPW1.C 25.29,79.05 v23.89,77.64 | C6.2 24.23,75.58 v25.25,75.58 | CU2.2 22.93,68.06 v22.93,64.88 | v31.51,71.39 32.48,71.55 32.5,71.57 X7.5 | CU1.1 39.34,68.33 v38.52,67.51 | 32U1.35 28.35,52.64 v28.95,54.74 | RK3.1 30.69,50.68 v31.92,52.19 | BKLD1.C 35.08,46.7 v35.36,46.42 | LCD1.1 39.17,44.75 R7.2 | C3.1 18.22,69.28 v15.95,71.55 | X9.2 X9.1 17.62,76.11 v18.05,76.54 | v40.86,55.01 40.72,55.15 X10.1 X10.2
  Bottom 0.406: v17.56,57.45 17.95,57.44 18.29,57.1 | v4.79,49.33 4.2,49.33 | v5.88,60.86 5.67,60.88 5.54,61.01 | v23.89,77.64 24.02,77.64 24.04,77.66 | v25.25,75.58 24.94,75.89 24.94,76.14 | v22.93,64.88 23.2,65.09 23.11,64.84 | v38.52,67.51 | v38.52,67.51 38.05,67.04 | v31.92,52.19 32.4,52.19 | v35.36,46.42 35.36,46.5 35.48,46.62 | v18.05,76.54 18.05,76.99 | v40.86,55.01 41,55.01 41.25,54.76
  pour Bottom: 0.58,81.42 0.53,81.44 0.8,42.18 42.3,42.34 42.3,61.62 42.49,62.25 42.49,82.15 1.83,81.8 0.81,81.68
GND2  (via drill 0.8, 0.8 pad 0.81)
  Top 0.406: v61.33,57.54 61.26,57.52 32U2.15 54.63,57.53 C14.1 | 32U2.5 65.94,60 v65.95,59.38 | C9.2 50.44,64.06 v48.6,64.05 48.6,66.58 SJ3.1 | CX5.1 46.79,60.98 v49.65,60.95 | 32U2.23 60.88,50.12 v59.46,50.11 | v48.56,49.42 46.11,49.42 CX6.1 | 32U2.43 68.69,59.13 v68.67,58.29 | C7.2 73.36,62.14 v74.93,62.14 | LDPW2.C 69.06,79.14 v67.66,77.73 | C15.2 68,75.67 v69.02,75.67 | CU10.2 66.71,68.15 v66.7,64.97 | v75.28,71.48 76.25,71.64 76.27,71.66 X11.5 | CU8.1 83.11,68.42 v82.29,67.6 | 32U2.35 72.12,52.73 v72.72,54.83 | RK9.1 74.46,50.77 v75.69,52.28 | BKLD2.C 78.85,46.79 v79.13,46.51 | LCD2.1 82.95,44.84 R11.2 | C8.1 61.99,69.37 v59.72,71.64 | X13.2 X13.1 61.39,76.2 v61.82,76.63 | v84.63,55.1 84.49,55.24 X14.1 X14.2
  Bottom 0.406: v61.33,57.54 61.72,57.53 62.06,57.19 | v48.56,49.42 47.98,49.42 | v49.65,60.95 49.44,60.97 49.31,61.1 | v67.66,77.73 67.79,77.73 67.81,77.75 | v69.02,75.67 68.71,75.98 68.71,76.23 | v66.7,64.97 66.97,65.18 66.88,64.93 | v82.29,67.6 | v82.29,67.6 81.82,67.13 | v75.69,52.28 76.17,52.28 | v79.13,46.51 79.13,46.59 79.25,46.71 | v61.82,76.63 61.82,77.08 | v84.63,55.1 84.77,55.1 85.02,54.85
  pour Bottom: 44.35,81.51 44.31,81.53 44.57,42.27 86.07,42.43 86.07,61.71 86.26,62.34 86.26,82.24 45.61,81.89 44.58,81.77
GND3
  Top 0.406: X15.8 X15.7 54.14,26.08 U$2.C U$2.E
  pour Bottom: 44.88,37.88 70.53,37.88 70.53,19.29 44.71,19.29 44.71,37.63
GND4
  Top 0.406: X17.8 X17.7 83.34,16.52 U$3.C U$3.E
  pour Bottom: 71.54,7.25 71.54,32.9 90.13,32.9 90.13,7.08 71.79,7.08
HWB
  Top 0.406: 32U4.33 28.23,8.54 RK7.2
HWB1
  Top 0.406: 32U1.33 28.36,50.04 RK3.2
HWB2
  Top 0.406: 32U2.33 72.13,50.13 RK9.2
ISP+5V
  Bottom 0.406: CON_ISP.5V 19.87,27.24 18.83,27.24 18.64,27.13 18.64,25.51 D2.A
ISP+5V1
  Bottom 0.406: CON_ISP1.5V 20.01,68.74 18.96,68.74 18.78,68.64 18.78,67.01 D1.A
ISP+5V2
  Bottom 0.406: CON_ISP2.5V 63.78,68.83 62.73,68.83 62.55,68.73 62.55,67.1 D5.A
MISO  (via drill 0.8, 0.8 pad 0.61)
  Top 0.406: 32U4.11 15.89,20.14 v12.72,23.3 | X3.4 13.19,34.59 13.19,30.29 13.14,30.29 12.26,29.4 12.26,26.06 v12.72,25.59
  Bottom 0.406: v12.72,23.3 v12.72,25.59 15.92,28.79 15.96,28.75 16.67,28.75 18.44,30.51 20.03,30.51 20.7,29.84 CON_ISP.MISO
MISO1  (via drill 0.8, 0.8 pad 0.61)
  Top 0.406: 32U1.11 16.02,61.64 v12.86,64.81 | X9.4 13.32,76.09 13.32,71.79 13.27,71.79 12.39,70.91 12.39,67.56 v12.86,67.09
  Bottom 0.406: v12.86,64.81 v12.86,67.09 16.05,70.29 16.09,70.25 16.8,70.25 18.57,72.02 20.16,72.02 20.83,71.35 CON_ISP1.MISO
MISO2  (via drill 0.8, 0.8 pad 0.61)
  Top 0.406: 32U2.11 59.79,61.73 v56.63,64.9 | X13.4 57.09,76.18 57.09,71.88 57.04,71.88 56.16,71 56.16,67.65 v56.63,67.18
  Bottom 0.406: v56.63,64.9 v56.63,67.18 59.83,70.38 59.86,70.34 60.58,70.34 62.34,72.11 63.93,72.11 64.6,71.44 CON_ISP2.MISO
MOSI  (via drill 0.8)
  Top 0.406: 32U4.10 18.04,21.32 17.23,22.13 16.17,22.13 v15.32,22.97 13.82,24.48 11.59,24.48 10.91,25.16 10.91,29.88 12.17,31.14 X3.5
  Bottom 0.406: CON_ISP.MOSI 21.97,26.91 20.87,26.91 20.25,26.29 20.25,24.33 20.16,24.24 19.78,23.9 16.25,23.9 v15.32,22.97
MOSI1  (via drill 0.8)
  Top 0.406: 32U1.10 18.17,62.83 17.37,63.63 16.3,63.63 v15.46,64.48 13.95,65.99 11.72,65.99 11.04,66.66 11.04,71.38 12.3,72.64 X9.5
  Bottom 0.406: CON_ISP1.MOSI 22.1,68.42 21,68.42 20.38,67.79 20.38,65.83 20.29,65.75 19.91,65.4 16.38,65.4 v15.46,64.48
MOSI2  (via drill 0.8)
  Top 0.406: 32U2.10 61.94,62.92 61.14,63.72 60.07,63.72 v59.23,64.57 57.72,66.08 55.49,66.08 54.81,66.75 54.81,71.47 56.08,72.73 X13.5
  Bottom 0.406: CON_ISP2.MOSI 65.87,68.51 64.77,68.51 64.15,67.88 64.15,65.93 64.06,65.84 63.68,65.49 60.15,65.49 v59.23,64.57
N$1
  Top 0.406: 32U4.6 21.24,24.06 C13.2
N$2
  Top 0.406: LCD.3 34.69,2.58 37.14,5.03 R3.1 37.12,5.76 RK1.2
N$3
  Top 0.406: R2.2 34.93,8.73 BKLD.A
N$4
  Top 0.406: R4.2 21.97,79 LDPW1.A
N$5
  Top 0.406: R5.2 35.06,50.23 BKLD1.A
N$6
  Top 0.406: 32U1.17 8.88,55.84 X8.P$2 | CX4.2 6.51,52.81 7.1,53.4 6.54,53.4 X8.P$2 | RXT1.2 4.97,54.97 X8.P$2
N$7
  Top 0.406: 32U1.6 21.37,65.56 C3.2
N$8
  Top 0.406: LCD1.3 34.82,44.08 37.27,46.53 R7.1 37.25,47.26 RK5.2
N$9
  Top 0.406: 1.2 4.44,43.79 LCD1.15
N$10
  Top 0.406: R8.2 65.74,79.09 LDPW2.A
N$11
  Top 0.406: 220.2 4.3,2.28 LCD.15
N$12
  Top 0.406: R13.2 21.84,37.5 LDPW5.A
N$13
  Top 0.406: R9.2 78.83,50.33 BKLD2.A
N$14
  Top 0.406: 32U2.17 52.65,55.93 X12.P$2 | CX6.2 50.28,52.9 50.87,53.49 50.31,53.49 X12.P$2 | RXT2.2 48.74,55.06 X12.P$2
N$15
  Top 0.406: 32U2.6 65.14,65.65 C8.2
N$16
  Top 0.406: LCD2.3 78.59,44.17 81.05,46.62 R11.1 81.02,47.35 RK11.2
N$17
  Top 0.406: 2.2 48.21,43.88 LCD2.15
N$42
  Top 0.406: 32U4.17 8.75,14.34 X2.P$2 | CX1.2 6.37,11.31 6.96,11.9 6.41,11.9 X2.P$2 | RXT.2 4.84,13.47 X2.P$2
RESET  (via drill 0.8 pad 0.81)
  Top 0.406: 32U4.13 13.98,17.54 11.35,20.16 11.35,21.28 10.05,22.58 9.51,22.58 C11.1 | 9.62,22.44 C11.1 | C11.1 9.49,23.77 8.31,24.95 6.35,24.95 SJ1.2 6.27,27.39 RK6.1 7.42,27.39 v8.78,28.78
  Bottom 0.406: CON_ISP.RESET 23.24,30.6 20.45,33.39 13.44,33.39 v8.78,28.78
RESET1  (via drill 0.8 pad 0.81)
  Top 0.406: 32U1.13 14.11,59.04 11.49,61.66 11.49,62.78 10.19,64.08 9.64,64.08 C4.1 | 9.75,63.95 C4.1 | C4.1 9.62,64.08 9.62,65.28 8.44,66.46 6.49,66.46 SJ2.2 6.41,68.89 RK4.1 7.55,68.89 v8.92,70.28
  Bottom 0.406: CON_ISP1.RESET 23.37,72.11 20.59,74.89 13.57,74.89 v8.92,70.28
RESET2  (via drill 0.8 pad 0.81)
  Top 0.406: 32U2.13 57.88,59.13 55.26,61.75 55.26,62.87 53.96,64.17 53.41,64.17 C9.1 | 53.52,64.04 C9.1 | C9.1 53.39,64.17 53.39,65.37 52.21,66.55 50.26,66.55 SJ3.2 50.18,68.98 RK10.1 51.32,68.98 v52.69,70.37
  Bottom 0.406: CON_ISP2.RESET 67.14,72.2 64.36,74.98 57.34,74.98 v52.69,70.37
RX  (via drill 0.8)  (1 unrouted)
  Top 0.406: 32U4.20 13.26,11.94 v12.6,12.59 | v33.25,16.39 33.91,17.05 RE2.2 34.01,18.65 X1.6 | U$1.B 53.21,8.95 51.83,10.33 X5.3
  Bottom 0.406: v12.6,12.59 12.64,12.59 13.68,11.55 22.35,11.55 23.29,10.61 24.79,10.61 24.81,10.63 28.29,10.63 33.25,15.59 v33.25,16.39 | X6.3 52.41,7.34 52.73,7.66 U$1.B
RX1  (via drill 0.8)
  Top 0.406: 32U1.20 13.39,53.44 v12.73,54.09 | v33.38,57.89 34.04,58.55 RE4.2 34.14,60.15 X10.6
  Bottom 0.406: v12.73,54.09 12.77,54.09 13.81,53.05 22.49,53.05 23.43,52.11 24.92,52.11 24.94,52.13 28.42,52.13 33.38,57.09 v33.38,57.89
RX2  (via drill 0.8)
  Top 0.406: 32U2.20 57.16,53.53 v56.5,54.18 | v77.15,57.98 77.81,58.64 RE6.2 77.91,60.24 X14.6
  Bottom 0.406: v56.5,54.18 56.54,54.18 57.58,53.14 66.26,53.14 67.2,52.2 68.69,52.2 68.72,52.22 72.19,52.22 77.15,57.18 v77.15,57.98
RX3
  Top 0.406: U$2.B 53.21,28.7 51.83,30.08 X15.3
  Bottom 0.406: X16.3 52.41,27.08 52.73,27.41 U$2.B
RX4
  Top 0.406: U$3.B 80.72,15.58 79.34,14.2 X17.3
  Bottom 0.406: X18.3 82.34,14.78 82.01,15.1 U$3.B
RXLED
  Top 0.406: 32U4.8 19.64,23.16 15.62,27.17 R1.2
RXLED1
  Top 0.406: 32U1.8 19.77,64.66 15.75,68.68 R6.2
RXLED2
  Top 0.406: 32U2.8 63.54,64.75 59.52,68.77 R10.2
SCK  (via drill 0.8)
  Top 0.406: 32U4.9 18.84,22.07 15.76,25.15 v15.26,25.15 | X3.6 11.17,33.71 9.92,32.46 9.92,26.82 v9.74,26.63 9.74,24.92 11.15,23.52 11.15,23 v13.8,20.35
  Bottom 0.406: CON_ISP.SCK 21.96,30.44 19.99,32.41 13.94,32.41 11.01,29.48 11.01,27.46 10.18,26.63 v9.74,26.63 | v15.26,25.15 14.13,24.01 14.13,20.35 v13.8,20.35
SCK1  (via drill 0.8)
  Top 0.406: 32U1.9 18.97,63.57 15.89,66.65 v15.4,66.65 | X9.6 11.3,75.22 10.06,73.97 10.06,68.32 v9.87,68.14 9.87,66.43 11.28,65.02 11.28,64.51 v13.93,61.86
  Bottom 0.406: CON_ISP1.SCK 22.09,71.94 20.12,73.91 14.07,73.91 11.14,70.99 11.14,68.96 10.31,68.14 v9.87,68.14 | v15.4,66.65 14.26,65.52 14.26,61.86 v13.93,61.86
SCK2  (via drill 0.8)
  Top 0.406: 32U2.9 62.74,63.66 59.66,66.74 v59.17,66.74 | X13.6 55.08,75.31 53.83,74.06 53.83,68.41 v53.64,68.23 53.64,66.52 55.05,65.11 55.05,64.6 v57.7,61.95
  Bottom 0.406: CON_ISP2.SCK 65.86,71.06 65.86,72.03 63.89,74 57.84,74 54.91,71.08 54.91,69.05 54.08,68.23 v53.64,68.23 | v59.17,66.74 58.03,65.61 58.03,61.95 v57.7,61.95
SCL
  Top 0.406: 15.45,13.54 32U4.18
SCL1
  Top 0.406: 32U1.18
SCL2
  Top 0.406: 59.36,55.13 32U2.18
TX  (via drill 0.8)  (1 unrouted)
  Top 0.406: 32U4.21 11.22,11.14 v11.17,11.09 | v35.39,24.63 33.92,23.16 RE1.2 | X1.5 35.4,17.65 v35.38,17.63 | X5.4 48.61,9.33 48.61,9.34 v47.17,9.34
  Bottom 0.406: v11.17,11.09 12.11,11.09 13.12,10.08 21.87,10.08 22.88,9.07 28.21,9.07 35.38,16.24 v35.38,17.63 35.38,19.85 35.39,19.87 v35.39,24.63 | U$1.A 53.34,11.45 52.38,10.5 52.38,8.85 51.87,8.34 X6.4 48.17,8.34 v47.17,9.34
TX1  (via drill 0.8)
  Top 0.406: 32U1.21 11.35,52.64 v11.31,52.6 | v35.53,66.14 34.05,64.66 RE3.2 | X10.5 35.53,59.15 v35.51,59.13
  Bottom 0.406: v11.31,52.6 12.25,52.6 13.26,51.59 22,51.59 23.01,50.58 28.34,50.58 35.51,57.74 v35.51,59.13 35.51,61.35 35.53,61.37 v35.53,66.14
TX2  (via drill 0.8)
  Top 0.406: 32U2.21 55.12,52.73 v55.08,52.69 | v79.3,66.23 77.82,64.75 RE5.2 | X14.5 79.3,59.24 v79.28,59.22
  Bottom 0.406: v55.08,52.69 56.02,52.69 57.03,51.68 65.77,51.68 66.78,50.67 72.12,50.67 79.28,57.83 v79.28,59.22 79.28,61.44 79.3,61.46 v79.3,66.23
TX3  (via drill 0.8)
  Top 0.406: X15.4 48.61,29.08 v47.17,29.08
  Bottom 0.406: U$2.A 53.34,31.2 52.38,30.25 52.38,28.6 51.87,28.08 X16.4 48.17,28.08 v47.17,29.08
TX4  (via drill 0.8)
  Top 0.406: X17.4 80.34,10.98 v80.34,9.54
  Bottom 0.406: U$3.A 78.22,15.71 79.17,14.76 80.82,14.76 81.34,14.24 X18.4 81.34,10.54 v80.34,9.54
USB_N
  Top 0.406: 32U4.3 23.64,21.44 27.41,25.21 28.12,25.21 RUSB1.1
USB_N1
  Top 0.406: 32U1.3 23.77,62.95 27.54,66.72 28.26,66.72 RUSB4.1
USB_N2
  Top 0.406: 32U2.3 67.54,63.04 71.31,66.81 72.03,66.81 RUSB6.1
USB_P
  Top 0.406: RUSB2.1 27.01,26.14 27,25.88 27,25.85 22.84,21.69 32U4.4
USB_P1
  Top 0.406: RUSB3.1 27.15,67.64 27.13,67.39 27.13,67.36 22.97,63.19 32U1.4
USB_P2
  Top 0.406: RUSB5.1 70.92,67.73 70.9,67.48 70.9,67.45 66.74,63.28 32U2.4
USBC_N
  Top 0.406: X4.2 34.77,27.48 RUSB1.2
USBC_N1
  Top 0.406: X7.2 34.9,68.98 RUSB4.2
USBC_N2
  Top 0.406: X11.2 78.67,69.07 RUSB6.2
USBC_P
  Top 0.406: X4.3 33.97,28.24 33.25,27.52 31.19,27.52 RUSB2.2
USBC_P1
  Top 0.406: X7.3 34.1,69.74 33.38,69.02 31.32,69.02 RUSB3.2
USBC_P2
  Top 0.406: X11.3 77.87,69.83 77.15,69.11 75.09,69.11 RUSB5.2
VUSB  (via drill 0.8, 0.8 pad 0.81)
  Top 0.406: 32U4.7 20.44,17.02 20.94,16.51 20.94,13.96 v23.48,13.51 | X4.1 35.57,30.69 v37.78,28.47 38.94,29.63 CU9.2
  Bottom 0.406: 23.47,13.43 v23.48,13.51 24.46,13.93 24.46,15.04 23.46,16.04 23.46,22 25.36,23.9 30.92,23.9 31.44,24.43 31.44,26.79 D4.A | D4.A 36.31,27 v37.78,28.47 | D4.A 31.23,26.93
VUSB1  (via drill 0.8, 0.8 pad 0.81)
  Top 0.406: 32U1.7 20.57,58.52 21.08,58.02 21.08,55.46 v23.61,55.01 | X7.1 35.7,72.19 v37.92,69.97 39.07,71.13 CU1.2
  Bottom 0.406: 23.61,54.93 v23.61,55.01 24.59,55.43 24.59,56.54 23.59,57.55 23.59,63.5 25.49,65.41 31.05,65.41 31.57,65.93 31.57,68.29 D3.A | D3.A 36.44,68.5 v37.92,69.97 | D3.A 31.36,68.44
VUSB2  (via drill 0.8, 0.8 pad 0.81)
  Top 0.406: 32U2.7 64.34,58.61 64.85,58.11 64.85,55.55 v67.38,55.1 | X11.1 79.47,72.28 v81.69,70.06 82.84,71.22 CU8.2
  Bottom 0.406: 67.38,55.02 v67.38,55.1 68.36,55.52 68.36,56.63 67.36,57.64 67.36,63.59 69.26,65.5 74.82,65.5 75.34,66.02 75.34,68.38 D6.A | D6.A 80.22,68.59 v81.69,70.06 | D6.A 75.13,68.53
XTAL1
  Top 0.406: 32U4.16 8.4,15.14 X2.P$1 | X2.P$1 1.9,17.18 CX2.2 | RXT.1 4.55,15.37 X2.P$1
XTAL2
  Top 0.406: 32U1.16 8.53,56.64 X8.P$1 | X8.P$1 2.03,58.68 CX3.2 | RXT1.1 4.68,56.87 X8.P$1
XTAL3
  Top 0.406: 32U2.16 52.31,56.73 X12.P$1 | X12.P$1 45.8,58.77 CX5.2 | RXT2.1 48.45,56.96 X12.P$1

## Text on the board
tNames: 5V | 5V | D11 | D11 | BLK | BLK | 1 | 1 | 5V | D11 | EC11E / Encoder | EC11E / Encoder | BLK | EC11E / Encoder | 1
bNames: Bio4_LCD_v1.1 | Bio4_LCD_v1.1 | Bio4_LCD_v1.1
tValues: Screen / v0.1
203bmp: C:/Users/G/Pictures/logo_epfl.bmp